# Altium PCB 核心板.PcbDoc
Units mm, origin at the board's own origin, x right, y up, seen from the top; angles counter-clockwise.
Board outline 59.69 x 46.99 mm, 2 copper layers (Top Layer, Bottom Layer); 53 components, 131 nets, 394 pads, 74 vias.
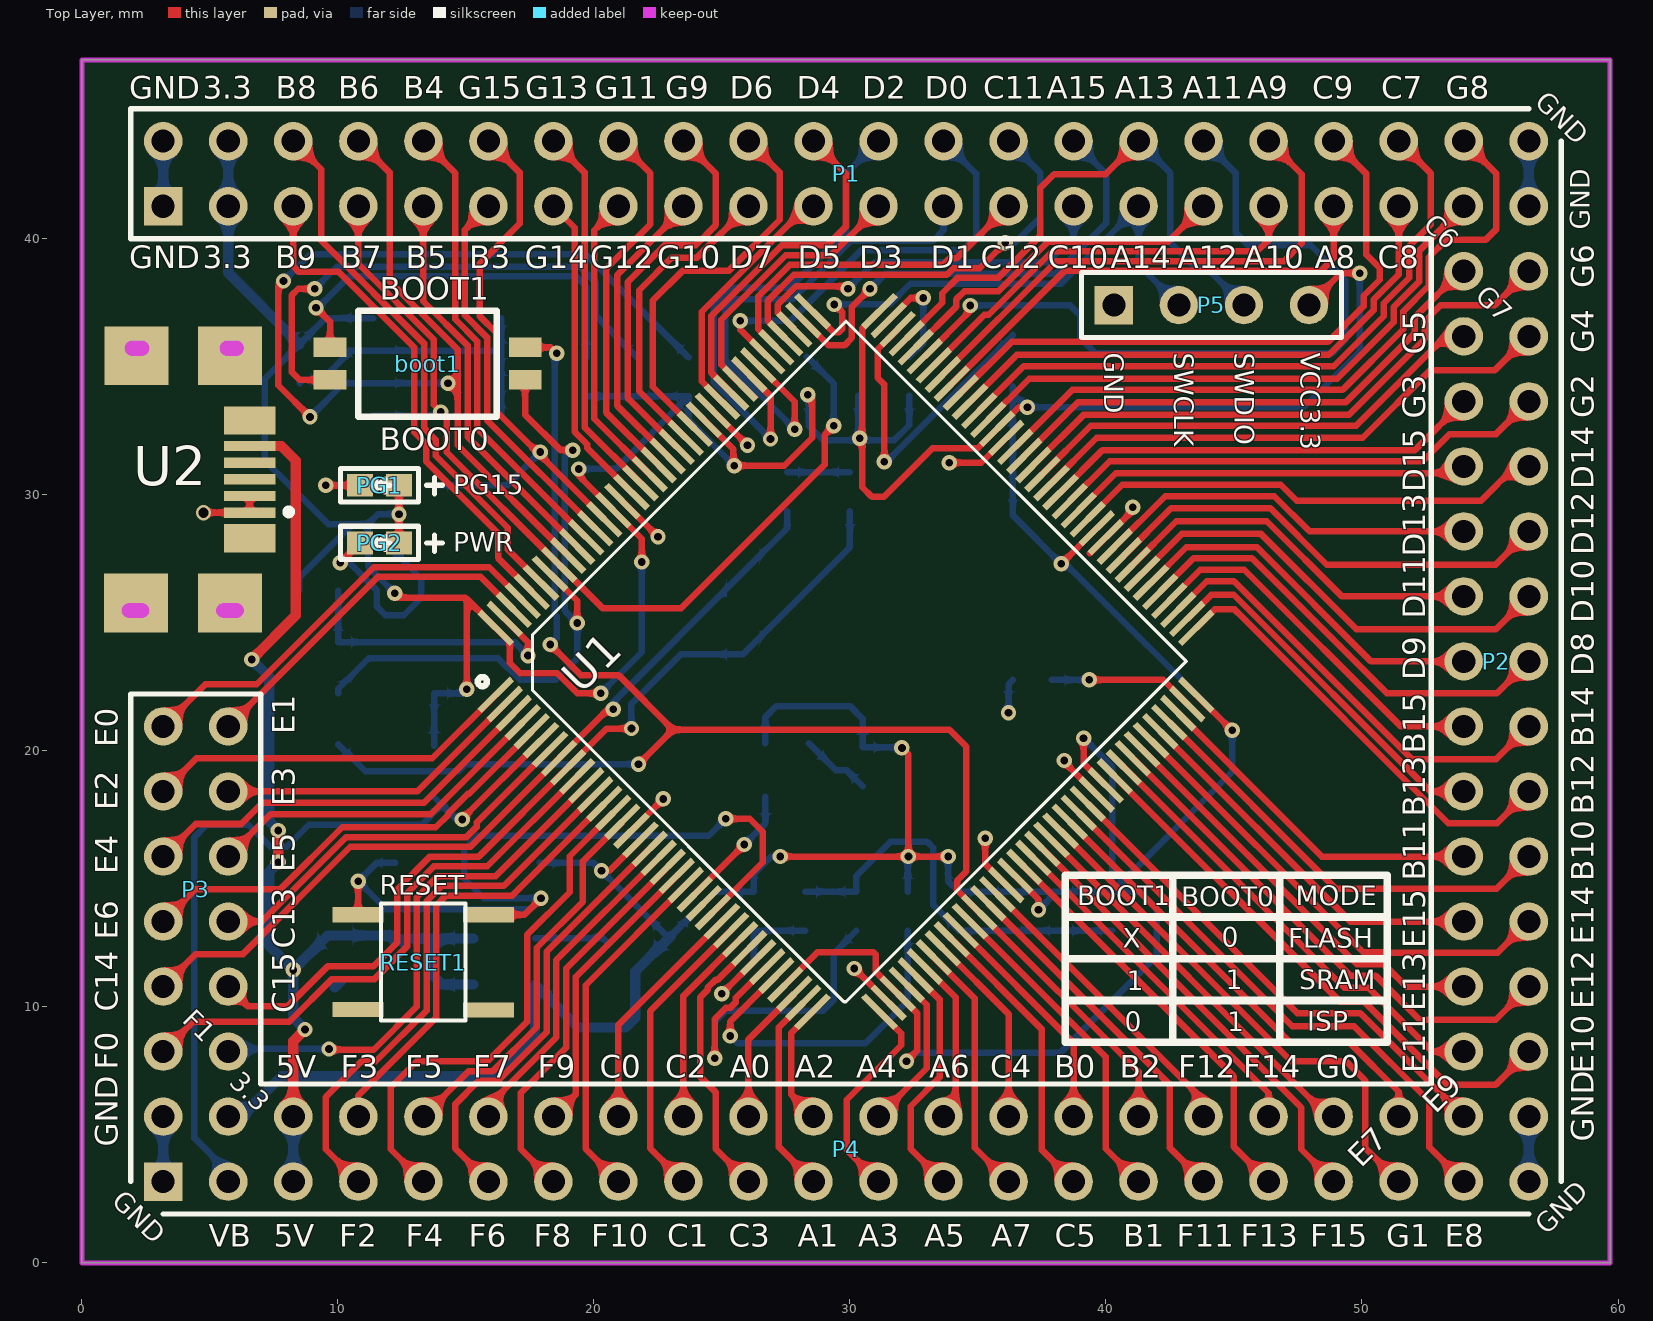
[diagram p0: Top Layer view]
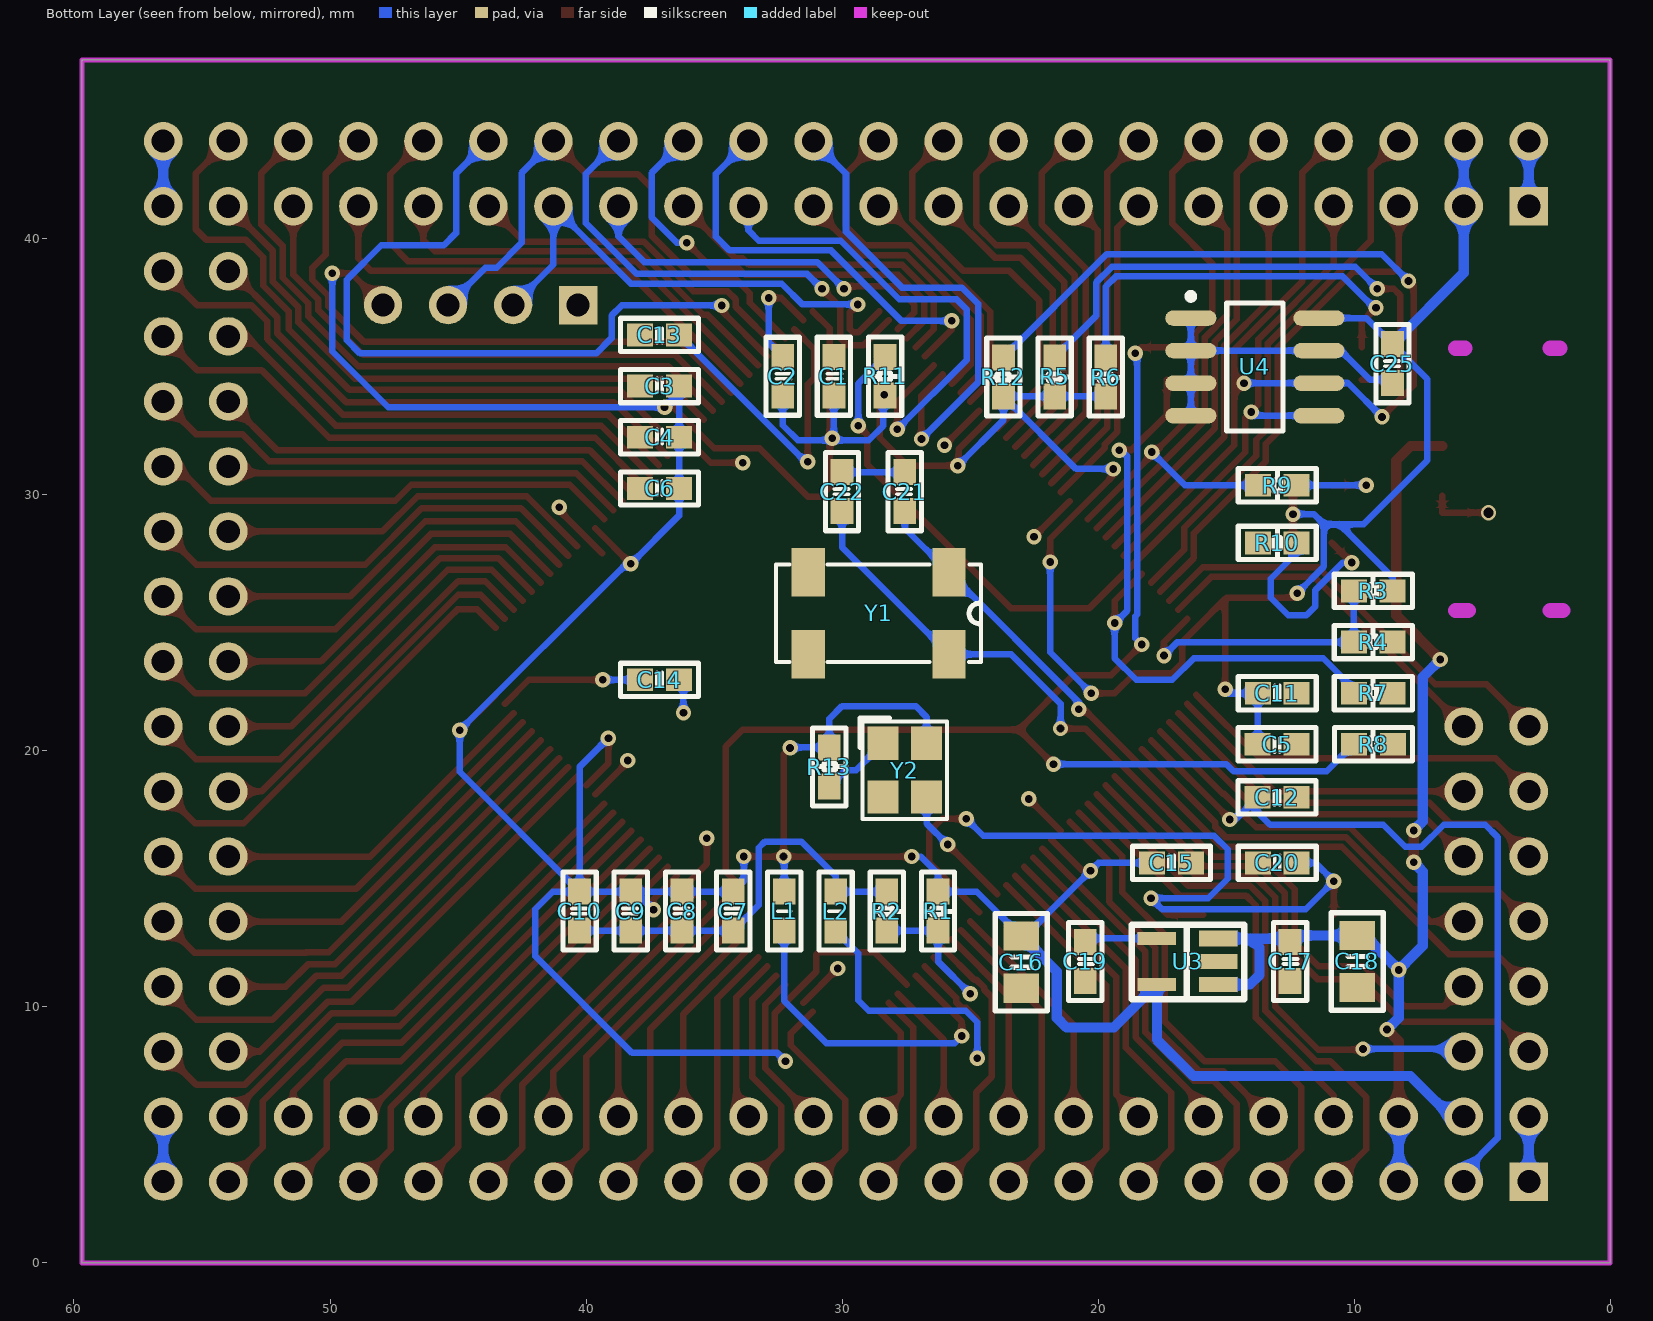
[diagram p1: Bottom Layer view, seen from below]

## Layer stack, top to bottom
Top Solder: solder mask 0.0102, Solder Resist, Dk 3.5
Top Layer: signal copper 0.0356
Dielectric 1: dielectric 0.32, FR-4, Dk 4.8
Bottom Layer: signal copper 0.0356
Bottom Solder: solder mask 0.0102, Solder Resist, Dk 3.5

## Board outline
0,0 0,46.99 59.69,46.99 59.69,0

## Design rules (kind name [scope] priority, off if disabled: settings)
Clearance Clearance_1 [InComponent('U2')] p1: gap=0 ignorepadtopadclearanceinfootprint=FALSE
Clearance [All] p2: gap=0.127 ignorepadtopadclearanceinfootprint=FALSE
ComponentClearance [All] p1: gap=0 collisioncheckmode=3 verticalgap=0 showdistances=FALSE
HoleSize HoleSize_Via [IsVia] p1: absolutevalues=TRUE maxlimit=2.54 minlimit=0.025 maxpercent=80.000 minpercent=20.000
HoleSize HoleSize_Pad [IsPad] p2: absolutevalues=TRUE maxlimit=6.35 minlimit=0.3 maxpercent=80.000 minpercent=20.000
HoleToHoleClearance [All] p1: gap=0.152 allowstackedmicrovias=TRUE
MinimumSolderMaskSliver [All] p1: minsoldermaskwidth=0.001
PolygonConnect [All] p1: connectstyle=Relief reliefconductorwidth=0.254 reliefentries=4 polygonreliefangle="90 Angle" airgapwidth=0.254
RoutingVias [All] p1: holewidth=0.3 width=0.6 viastyle="Through Hole" minholewidth=0.3 minwidth=0.6 maxholewidth=2.54 maxwidth=3
SilkToSilkClearance [All] p1: silktosilkclearance=0
SilkToSolderMaskClearance [IsPad] p1: minsilkscreentomaskgap=0 clearancetoexposedcopper=TRUE
SolderMaskExpansion [All] p1: expansion=0.102
Width [All] p1: maxlimit=3 minlimit=0.15 preferedwidth=0.254
24 further rules are at their usual default settings.

## Components (designator, comment, footprint, x,y, rotation, side; value= is the part's Value field where it differs from the comment)
boot1 "Header 2X2" BOOT 13.5,35.125 r90 top locked
C1 "104,0603" C0603 30.317,34.635 r90 bottom
C2 "104,0603" C0603 32.317,34.635 r90 bottom
C3 "104,0603" C0603 37.125,34.25 r0 bottom
C4 "104,0603" C0603 37.125,32.25 r0 bottom
C5 "104,0603" C0603 13.005,20.26 r180 bottom
C6 "104,0603" C0603 37.125,30.25 r0 bottom
C7 "104,0603" C0603 34.25,13.74 r270 bottom
C8 "104,0603" C0603 36.25,13.74 r270 bottom
C9 "104,0603" C0603 38.25,13.74 r270 bottom
C10 "104,0603" C0603 40.25,13.74 r270 bottom
C11 "104,0603" C0603 13,22.25 r0 bottom
C12 "104,0603" C0603 13.005,18.186 r180 bottom
C13 "104,0603" C0603 37.125,36.25 r180 bottom
C14 "104,0603" C0603 37.125,22.775 r0 bottom
C15 "104,0603" C0603 17.125,15.625 r0 bottom
C16 "105,0805" C0805tan 23,11.75 r90 bottom
C17 "104,0603" C0603 12.5,11.775 r90 bottom
C18 "105,0805" C0805tan 9.875,11.775 r90 bottom
C19 "223,0603" C0603 20.5,11.775 r90 bottom
C20 "104,0603" C0603 13,15.625 r0 bottom
C21 "10p,0603" C0603 27.548,30.125 r270 bottom
C22 "10p,0603" C0603 30,30.125 r270 bottom
C25 "104,0603" C0603 8.5,35.125 r270 bottom
L1 "4.8nH" L0603 32.257,13.74 r270 bottom
L2 "4.8nH" L0603 30.25,13.74 r270 bottom
P1 "Header 22X2" HDR2X22 3.175,41.275 r0 top locked
P2 "Header 13X2" HDR2X13 53.975,38.735 r270 top locked
P3 "Header 6X2" HDR2X6 3.175,20.955 r270 top
P4 "Header 22X2" "HDR2X22 - duplicate" 3.175,3.175 r0 top locked
P5 "4P,SWD" HDR1X4 40.31,37.414 r0 top locked
PG1 "LED,0805" LED0603 11.625,30.375 r0 top
PG2 "LED,0805" LED0603 11.625,28.125 r0 top
R1 "0R,0603" R0603 26.25,13.74 r270 bottom
R2 "0R,0603" R0603 28.25,13.74 r270 bottom
R3 "0R,0603" R0603 9.25,26.25 r0 bottom
R4 "0R,0603" R0603 9.25,24.25 r0 bottom
R5 "4.7K,0603" R0603 21.695,34.61 r270 bottom
R6 "4.7K,0603" R0603 19.695,34.6 r270 bottom
R7 "10K,0603" R0603 9.25,22.25 r0 bottom
R8 "10K,0603" R0603 9.246,20.26 r0 bottom
R9 "680R,0603" R0603 13,30.375 r180 bottom
R10 "680R,0603" R0603 13,28.125 r180 bottom
R11 "4.7K,0603" R0603 28.317,34.635 r270 bottom
R12 "4.7K,0603" R0603 23.695,34.61 r270 bottom
R13 "4.7K,0603" R0603 30.5,19.375 r90 bottom
RESET1 "SW-PB_V" KEY-SMT 13.335,11.75 r0 top locked
U1 "STM32F407ZGT6" TQFP-144 29.845,23.495 r45 top locked
U2 "micro USB" "MICRO_USB_V2 - DUPLICATE" 6.299,30.607 r270 top
U3 "RT9193" SOT-23-5 16.5,11.775 r90 bottom
U4 "AT24C512" SOP8_N 13.875,35 r180 bottom locked
Y1 "32.768K" MC-306 28.575,25.375 r0 bottom
Y2 "有源晶振" "OSC 3225-4P" 27.548,19.25 r270 bottom

## Footprints (in the part's own frame and the unit in brackets; to place one, negate y for a bottom-side part, rotate by r counter-clockwise, add the part's x,y. Pads: shape width x height; smd on the part's side, far side on the other; paste and mask are expansions set on the pad)
BOOT [mm]
  rect 0.76x1.27 smd: 1(-0.635,-3.81) 2(-0.635,3.81) 3(0.635,-3.81) 4(0.635,3.81)
  silkscreen extent -2.07,-2.7 2.07,2.7
C0603 [mil]
  rect 40x35 smd: 1(-29.92,0) 2(29.92,0)
  silkscreen extent -60,-26 60,26
C0805tan [mil]
  rect 45x55 smd: 1(-40,0) 2(40,0)
  silkscreen extent -75,-40 75,40
HDR1X4 [mm]
  rect 1.5x1.5 hole 0.9: 1(0,0)
  round 1.5 hole 0.9: 2(2.54,0) 3(5.08,0) 4(7.62,0)
  silkscreen extent -1.27,-1.27 8.89,1.27
HDR2X6 [mm]
  round 1.5 hole 0.9: 1(0,0) 2(0,2.54) 3(2.54,0) 4(2.54,2.54) 5(5.08,0) 6(5.08,2.54) 7(7.62,0) 8(7.62,2.54) 9(10.16,0) 10(10.16,2.54) 11(12.7,0) 12(12.7,2.54)
  silkscreen extent -1.27,-1.27 13.97,3.81
HDR2X13 [mm]
  round 1.5 hole 0.9: 1(0,0) 2(0,2.54) 3(2.54,0) 4(2.54,2.54) 5(5.08,0) 6(5.08,2.54) 7(7.62,0) 8(7.62,2.54) 9(10.16,0) 10(10.16,2.54) 11(12.7,0) 12(12.7,2.54) 13(15.24,0) 14(15.24,2.54) 15(17.78,0) 16(17.78,2.54) 17(20.32,0) 18(20.32,2.54) 19(22.86,0) 20(22.86,2.54) 21(25.4,0) 22(25.4,2.54) 23(27.94,0) 24(27.94,2.54) 25(30.48,0) 26(30.48,2.54)
  silkscreen extent -1.27,-1.27 31.75,3.81
HDR2X22 [mm]
  rect 1.5x1.5 hole 0.9: 1(0,0)
  round 1.5 hole 0.9: 2(0,2.54) 3(2.54,0) 4(2.54,2.54) 5(5.08,0) 6(5.08,2.54) 7(7.62,0) 8(7.62,2.54) 9(10.16,0) 10(10.16,2.54) 11(12.7,0) 12(12.7,2.54) 13(15.24,0) 14(15.24,2.54) 15(17.78,0) 16(17.78,2.54) 17(20.32,0) 18(20.32,2.54) 19(22.86,0) 20(22.86,2.54) 21(25.4,0) 22(25.4,2.54) 23(27.94,0) 24(27.94,2.54) 25(30.48,0) 26(30.48,2.54) 27(33.02,0) 28(33.02,2.54) 29(35.56,0) 30(35.56,2.54) 31(38.1,0) 32(38.1,2.54) 33(40.64,0) 34(40.64,2.54) 35(43.18,0) 36(43.18,2.54) 37(45.72,0) 38(45.72,2.54) 39(48.26,0) 40(48.26,2.54) 41(50.8,0) 42(50.8,2.54) 43(53.34,0) 44(53.34,2.54)
  silkscreen extent -1.27,-1.27 54.61,3.81
"HDR2X22 - duplicate" [mm]
  rect 1.5x1.5 hole 0.9: 1(0,0)
  round 1.5 hole 0.9: 2(0,2.54) 3(2.54,0) 4(2.54,2.54) 5(5.08,0) 6(5.08,2.54) 7(7.62,0) 8(7.62,2.54) 9(10.16,0) 10(10.16,2.54) 11(12.7,0) 12(12.7,2.54) 13(15.24,0) 14(15.24,2.54) 15(17.78,0) 16(17.78,2.54) 17(20.32,0) 18(20.32,2.54) 19(22.86,0) 20(22.86,2.54) 21(25.4,0) 22(25.4,2.54) 23(27.94,0) 24(27.94,2.54) 25(30.48,0) 26(30.48,2.54) 27(33.02,0) 28(33.02,2.54) 29(35.56,0) 30(35.56,2.54) 31(38.1,0) 32(38.1,2.54) 33(40.64,0) 34(40.64,2.54) 35(43.18,0) 36(43.18,2.54) 37(45.72,0) 38(45.72,2.54) 39(48.26,0) 40(48.26,2.54) 41(50.8,0) 42(50.8,2.54) 43(53.34,0) 44(53.34,2.54)
  silkscreen extent -1.27,-1.27 54.61,3.81
KEY-SMT [mm]
  rect 2x0.6 smd: 1(-2.55,-1.85) 1(2.55,-1.87) 2(-2.55,1.85) 2(2.55,1.85)
  silkscreen extent -1.65,-2.29 1.65,2.29
L0603 [mil]
  rect 40x35 smd: 1(-29.92,0) 2(29.92,0)
  silkscreen extent -60,-26 60,26
LED0603 [mil]
  rect 40x35 smd: 1(29.92,0) 2(-29.92,0)
  silkscreen extent -60,-26 97,26
MC-306 [mm]
  rect 1.3x1.9 smd: 1(-2.75,-1.6) 2(2.75,-1.6) 3(2.75,1.6) 4(-2.75,1.6)
  silkscreen extent -4,-1.9 4,1.9
"MICRO_USB_V2 - DUPLICATE" [mm]
  rect 0.4x2 smd: 1(1.3,0.254) 2(0.65,0.254) 3(0,0.254) 4(-0.65,0.254) 5(-1.3,0.254)
  rect 2.3x2.5 smd: ""(-4.826,-0.508) ""(-4.826,-4.175) ""(4.826,-0.508) ""(4.826,-4.191)
  rect 1.1x2 smd: ""(-2.3,0.254) ""(2.3,0.254)
  Keep-Out Layer lines w0.6: 5.125,-4.445 5.125,-3.962 ; -5.12,-4.335 -5.12,-3.962 ; 5.125,-0.762 5.125,-0.262 ; -5.125,-0.635 -5.125,-0.262
  silkscreen extent 1.15,1.65 1.4,1.9
"OSC 3225-4P" [mm] "3.2*2.5*0.7mm(长宽高)"
  rect 1.3x1.2 smd: 1(-1.05,-0.85) 2(1.05,-0.85) 3(1.05,0.85) 4(-1.05,0.85)
  silkscreen extent -2.03,-1.75 1.91,1.65, body extent -1.6,-1.25 1.6,1.25, height 0.7
R0603 [mil]
  rect 40x35 smd: 1(-29.92,0) 2(29.92,0)
  silkscreen extent -60,-26 60,26
SOP8_N [mm]
  oval 2x0.6 smd: 1(-2.5,1.905) 2(-2.5,0.635) 3(-2.5,-0.635) 4(-2.5,-1.905) 5(2.5,-1.905) 6(2.5,-0.635) 7(2.5,0.635) 8(2.5,1.905)
  silkscreen extent -2.63,-2.5 1.1,2.88, body extent -2,-2.5 2,2.5, height 1.75
SOT-23-5 [mm]
  rect 0.6x1.5 smd: 1(-0.9,-1.2) 2(0,-1.2)
  rect 0.63x1.5 smd: 3(0.9,-1.2)
  rect 0.5x1.5 smd: 4(0.9,1.2) 5(-0.9,1.2)
  silkscreen extent -1.47,-2.21 1.43,2.18
TQFP-144 [mm]
  rect 1.778x0.254 smd: 1(-10.6,8.75) 2(-10.6,8.25) 3(-10.6,7.75) 4(-10.6,7.25) 5(-10.6,6.75) 6(-10.6,6.25) 7(-10.6,5.75) 8(-10.6,5.25) 9(-10.6,4.75) 10(-10.6,4.25) 11(-10.6,3.75) 12(-10.6,3.25) 13(-10.6,2.75) 14(-10.6,2.25) 15(-10.6,1.75) 16(-10.6,1.25) 17(-10.6,0.75) 18(-10.6,0.25) 19(-10.6,-0.25) 20(-10.6,-0.75) 21(-10.6,-1.25) 22(-10.6,-1.75) 23(-10.6,-2.25) 24(-10.6,-2.75) 25(-10.6,-3.25) 26(-10.6,-3.75) 27(-10.6,-4.25) 28(-10.6,-4.75) 29(-10.6,-5.25) 30(-10.6,-5.75) 31(-10.6,-6.25) 32(-10.6,-6.75) 33(-10.6,-7.25) 34(-10.6,-7.75) 35(-10.6,-8.25) 36(-10.6,-8.75) 73(10.6,-8.75) 74(10.6,-8.25) 75(10.6,-7.75) 76(10.6,-7.25) 77(10.6,-6.75) 78(10.6,-6.25) 79(10.6,-5.75) 80(10.6,-5.25) 81(10.6,-4.75) 82(10.6,-4.25) 83(10.6,-3.75) 84(10.6,-3.25) 85(10.6,-2.75) 86(10.6,-2.25) 87(10.6,-1.75) 88(10.6,-1.25) 89(10.6,-0.75) 90(10.6,-0.25) 91(10.6,0.25) 92(10.6,0.75) 93(10.6,1.25) 94(10.6,1.75) 95(10.6,2.25) 96(10.6,2.75) 97(10.6,3.25) 98(10.6,3.75) 99(10.6,4.25) 100(10.6,4.75) 101(10.6,5.25) 102(10.6,5.75) 103(10.6,6.25) 104(10.6,6.75) 105(10.6,7.25) 106(10.6,7.75) 107(10.6,8.25) 108(10.6,8.75)
  rect 0.254x1.778 smd: 37(-8.75,-10.6) 38(-8.25,-10.6) 39(-7.75,-10.6) 40(-7.25,-10.6) 41(-6.75,-10.6) 42(-6.25,-10.6) 43(-5.75,-10.6) 44(-5.25,-10.6) 45(-4.75,-10.6) 46(-4.25,-10.6) 47(-3.75,-10.6) 48(-3.25,-10.6) 49(-2.75,-10.6) 50(-2.25,-10.6) 51(-1.75,-10.6) 52(-1.25,-10.6) 53(-0.75,-10.6) 54(-0.25,-10.6) 55(0.25,-10.6) 56(0.75,-10.6) 57(1.25,-10.6) 58(1.75,-10.6) 59(2.25,-10.6) 60(2.75,-10.6) 61(3.25,-10.6) 62(3.75,-10.6) 63(4.25,-10.6) 64(4.75,-10.6) 65(5.25,-10.6) 66(5.75,-10.6) 67(6.25,-10.6) 68(6.75,-10.6) 69(7.25,-10.6) 70(7.75,-10.6) 71(8.25,-10.6) 72(8.75,-10.6) 109(8.75,10.6) 110(8.25,10.6) 111(7.75,10.6) 112(7.25,10.6) 113(6.75,10.6) 114(6.25,10.6) 115(5.75,10.6) 116(5.25,10.6) 117(4.75,10.6) 118(4.25,10.6) 119(3.75,10.6) 120(3.25,10.6) 121(2.75,10.6) 122(2.25,10.6) 123(1.75,10.6) 124(1.25,10.6) 125(0.75,10.6) 126(0.25,10.6) 127(-0.25,10.6) 128(-0.75,10.6) 129(-1.25,10.6) 130(-1.75,10.6) 131(-2.25,10.6) 132(-2.75,10.6) 133(-3.25,10.6) 134(-3.75,10.6) 135(-4.25,10.6) 136(-4.75,10.6) 137(-5.25,10.6) 138(-5.75,10.6) 139(-6.25,10.6) 140(-6.75,10.6) 141(-7.25,10.6) 142(-7.75,10.6) 143(-8.25,10.6) 144(-8.75,10.6)
  silkscreen extent -10.78,-9.4 9.4,9.66

## Part data
boot1: "Header, 2-Pin, Dual row"
C1 C2 C3 C4 C5 C6 C7 C8 C9 C10 C11 C12 C13 C14 C15 C16 C17 C18 C19 C20 C21 C22 C25: library part CAP, "Capacitor"
L1 L2: library part Inductor, "Inductor"
P1 P4: "Header, 22-Pin, Dual row"
P2: "Header, 13-Pin, Dual row"
P3: "Header, 6-Pin, Dual row"
P5: library part "Header 4", "Header, 4-Pin"
PG1 PG2: library part LED
R1 R2 R3 R4 R5 R6 R7 R8 R9 R10 R11 R12 R13: library part Res2, "Resistor"
RESET1: "SWITCH"
U1: library part STM32F103ZET6, "STM32F103ZE"
U2: library part usb-STM
U3: library part RT9193X_5P
U4: library part ST24C08RB5, "Serial 8K (1K x 8) EEPROM"
Y1: library part XTAL, "Crystal Oscillator"
Y2: library part XTAL_Active

## Via types
v1: diameter 0.6, hole 0.3, Top Layer to Bottom Layer, tented both sides, 73 vias
v2: diameter 0.6, hole 0.4, Top Layer to Bottom Layer, tented both sides, 1 vias

## Nets (pads, with @x,y where several pads share a name; then routed paths per layer and width w, separated by ;. In a path a pad name is that pad's centre, name@x,y a point inside that pad or via, vN(x,y) a via of type N, cw(c..) or ccw(c..) an arc to the next point about the centre after c; other vN are vias at no path point)
+3.3: C1.1 C2.1 C3.1 C4.1 C5.1 C6.1 C7.1 C8.1 C9.1 C10.1 C11.2 C15.2 C16.2 C25.1 L1.1 P1.3 P1.4 P4.4 P5.4 PG1.1 PG2.1 R1.1 R3.1 R5.2 R6.2 R11.2 R12.2 R13.2 U1.17 U1.33 U1.39 U1.52 U1.62 U1.72 U1.84 U1.95 U1.108 U1.121 U1.131 U1.144 U3.5 U4.8 Y2.4 | length 255.6
  Top Layer w0.254: v1(12.217,26.162) 12.395,25.984 14.981,25.984 15.037,25.929 ; PG2.1 v1(12.385,29.25) PG1.1 ; v1(15.037,22.403) 15.037,25.929 ; v1(19.406,31.013) 19.406,30.752 U1.131 21.869,28.289 v1(21.869,27.381) ; v1(20.269,22.25) 19.355,22.25 18.567,23.038 17.12,23.038 16.713,23.444 16.713,24.252 U1.144 15.037,25.929 ; v1(20.295,15.316) 20.606,15.316 U1.17 ; U1.121 25.446,31.783 25.446,31.171 v1(25.476,31.14) 27.432,31.14 28.524,32.233 28.524,33.731 v1(28.346,33.909) ; v1(27.28,15.875) v1(32.283,15.875) ; U1.33 28.744,12.141 30.912,12.141 31.013,12.04 31.013,11.366 U1.39 32.619,9.761 32.619,8.286 v1(32.207,7.874) ; U1.108 30.48,36.504 30.48,30.302 30.861,29.921 31.318,29.921 33.223,31.826 34.994,31.826 U1.95 36.594,33.426 v1(36.932,33.426) ; v1(32.029,20.117) 32.283,19.863 v1(32.283,15.875) ; v1(33.833,15.875) v1(32.283,15.875) ; U1.52 37.363,14.209 v1(37.363,13.792) ; v1(38.251,27.305) U1.84 ; v1@39.125,20.419 39.125,19.518 U1.62 ; U1.72 v1@44.912,20.803 ; P5.4 49.175,38.659 v1(49.911,38.659)
  Bottom Layer w0.254: R3.1 8.49,26.776 10.569,28.854 ; U4.8 9.52,36.905 C25.1 7.137,34.522 7.137,31.344 9.627,28.854 10.569,28.854 ; v1(12.217,26.162) 11.176,27.203 11.176,28.854 ; v1(12.385,29.25) 11.572,29.25 11.176,28.854 ; C5.1@13.765,20.193 13.76,20.198 C11.2 14.884,22.25 v1(15.037,22.403) ; C15.2 19.986,15.625 v1(20.295,15.316) 22.845,12.766 C16.2 24.734,14.5 R1.1 26.25,15.201 26.924,15.875 v1(27.28,15.875) ; v1(19.406,31.013) 20.859,31.013 R12.2 ; R6.2 19.705,33.85 R5.2 R12.2 ; v1(20.269,22.25) 21.869,23.851 v1(21.869,27.381) ; v1(25.476,31.14) 23.695,32.921 R12.2 ; Y2.4 26.698,21.323 27.125,21.75 30,21.75 30.5,21.25 R13.2 v1@32.011,20.135 ; R11.2 28.392,33.8 28.392,32.695 28.956,32.131 v1@30.353,32.131 ; C1.1 30.317,32.167 v1@30.353,32.131 ; v1(32.207,7.874) 32.537,8.204 38.202,8.204 41.986,11.989 41.986,13.818 41.304,14.5 C10.1 ; L1.1 v1@32.257,15.874 ; C2.1 32.317,32.723 31.725,32.131 v1@30.353,32.131 ; v1(33.833,15.875) 33.833,14.917 C7.1 C8.1 C9.1@38.071,14.5 ; C3.1 C3.1@36.365,33.942 ; v1(37.363,13.792) C9.1@38.071,14.5 ; v1(39.125,20.5) 40.25,19.375 C10.1 ; v1(49.911,38.659) 49.911,35.611 47.727,33.426 v1(36.932,33.426) 36.881,33.426 C3.1@36.365,33.942 ; 10.569,28.854 11.176,28.854 ; C3.1@36.365,33.942 C4.1 C6.1 36.365,29.191 v1(38.251,27.305) 38.43,27.305 v1(44.933,20.803) 44.933,19.183 C10.1 ; C9.1@38.071,14.5 C9.1 C10.1
  Bottom Layer w0.4: P4.4 6.215,5.715 7.8,7.3 16.275,7.3 17.7,8.725 U3.5 19.38,9.195 21.234,9.195 21.615,9.576 21.615,11.381 C16.2 ; P1.4 P1.3 5.715,38.67 C25.1
  other v1: 30.378,32.207
+5: C17.2 C18.2 P4.5 P4.6 U2.5 U3.1 U3.3 | length 43.6
  Top Layer w0.4: U2.5 7.793,31.907 8.357,31.344 8.357,25.298 v1(6.629,23.571) ; v1(7.671,15.646) v1(7.671,16.891) ; P4.6 8.255,8.661 v1(8.712,9.119)
  Bottom Layer w0.4: v1(6.629,23.571) 7.315,22.885 7.315,17.247 v1(7.671,16.891) ; v1(7.671,15.646) 7.315,15.291 7.315,12.385 v1(8.255,11.445) ; P4.5 P4.6 ; v1(8.712,9.119) 8.255,9.576 v1(8.255,11.445) ; C17.2@12.25,12.535 C17.2@12.375,12.66 ; C17.2@12.39,12.675 C17.2@12.375,12.66 ; U3.1 14.068,10.875 13.691,11.252 13.691,12.319 14.047,12.675 ; U3.3 14.047,12.675 ; v1(8.255,11.445) 9.601,12.791 C18.2 12.244,12.791 C17.2@12.375,12.66 ; C17.2@12.375,12.66 C17.2 12.64,12.675 14.047,12.675
BOOT0: boot1.1 R7.2 U1.138 | length 25.4
  Top Layer w0.254: boot1.1 17.31,33.134 18.694,31.75 v1(19.177,31.75) ; U1.138 19.344,25.864 v1(19.344,24.994)
  Bottom Layer w0.254: R7.2 10.01,22.431 11.201,23.622 16.256,23.622 17.103,22.775 18.508,22.775 19.355,23.622 19.355,24.983 v1(19.344,24.994) 18.852,25.486 18.852,31.501 19.101,31.75 v1(19.177,31.75)
BOOT1: boot1.3 P4.32 R8.2 U1.48 | length 62.5
  Top Layer w0.254: boot1.3 18.317,35.76 v1(18.542,35.535) ; v1(18.288,24.155) 19.482,22.962 20.955,22.962 23.089,20.828 ; v1(21.742,19.482) 23.089,20.828 ; P4.32 41.275,7.469 U1.48 34.188,14.555 34.188,14.935 34.544,15.291 34.544,20.168 33.884,20.828 23.089,20.828
  Bottom Layer w0.254: R8.2 11.064,19.202 14.707,19.202 14.986,19.482 v1(21.742,19.482) ; v1(18.288,24.155) 18.542,24.409 18.542,25.257 18.471,25.329 18.471,35.463 v1(18.542,35.535)
GND: C1.2 C2.2 C3.2 C4.2 C5.2 C6.2 C7.2 C8.2 C9.2 C10.2 C11.1 C12.2 C13.1 C14.1 C15.1 C16.1 C17.1 C18.1 C19.1 C20.2 C21.1 C22.1 C25.2 L2.1 P1.1 P1.2 P1.43 P1.44 P4.1 P4.2 P4.43 P4.44 P5.1 R2.1 R4.1 R7.1 R8.1 R10.1 RESET1.1 U1.16 U1.38 U1.51 U1.61 U1.83 U1.94 U1.107 U1.120 U1.130 U2.1 U2.2 U3.2 U4.1 U4.2 U4.3 U4.4 U4.7 Y2.2 | length 65.7
  Top Layer w0.254: v2(4.75,29.307) U2.1 U2.2 ; U1.130 v1(22.5,28.365) ; U1.16 v1(22.707,18.125) ; U1.120 v1(26,31.936) ; v1(30.173,11.5) U1.38 ; U1.107 32.376,37.694 v1(32.868,37.694) ; v1(33.875,31.257) 35.132,31.257 U1.94 ; v1(35.281,16.586) 35.281,15.585 U1.51 ; v1@38.375,19.561 U1.61 ; U1.83@39.373,27.72 U1.83 41.046,29.393 v1(41.046,29.515)
  Bottom Layer w0.254: C25.2 8.635,34.5 9.375,34.5 10.51,35.635 U4.7 U4.2 ; U4.4 U4.3 U4.2 ; U4.1 U4.2 ; C21.1 C22.1 ; R2.1 L2.1 30.25,15.112 31.598,16.459 33.005,16.459 33.25,16.215 33.25,13.98 C7.2 C8.2 C9.2 C10.2 ; C2.2 32.868,35.946 v1(32.868,37.694) ; v1(36.195,21.488) 36.195,22.605 C14.1
  Bottom Layer w0.4: P4.1 P4.2 ; P1.1 P1.2 ; C18.1 C18.1@10.131,11.015 ; P4.43 P4.44 ; P1.43 P1.44
  other v1: 38.375,19.625
GNDOrVCAP_1: C14.2 U1.71 | length 5.7
  Top Layer w0.254: v1(39.35,22.775) 42.232,22.775 U1.71
  Bottom Layer w0.254: C14.2 v1(39.35,22.775)
GNDOrVCC2: R1.2 R2.2 U1.30 | length 7
  Top Layer w0.254: v1(24.994,10.516) 26.412,11.934 U1.30
  Bottom Layer w0.254: v1(24.994,10.516) 26.25,11.772 R1.2 R2.2
GNDOrVCC3: R3.2 R4.2 U1.143 | length 11.4
  Top Layer w0.254: U1.143 17.424,24.248 v1(17.424,23.724)
  Bottom Layer w0.254: R3.2 R4.2 16.898,24.25 v1(17.424,23.724)
NC/VCAP_2: C13.2 U1.106 | length 12.7
  Top Layer w0.254: v1(31.344,31.293) 31.344,34.315 31.09,34.569 31.09,35.687 31.86,36.458 U1.106
  Bottom Layer w0.254: v1(31.344,31.293) 31.425,31.293 36.365,36.233 C13.2
Netboot1_2: boot1.2 R5.1 | length 20.8
  Top Layer w0.254: v1(9.093,38.049) 8.447,38.049 8.204,37.806 8.204,34.793 8.507,34.49 boot1.2
  Bottom Layer w0.254: v1(9.093,38.049) 9.957,38.913 19.457,38.913 20.076,38.293 20.076,36.989 R5.1
Netboot1_4: boot1.4 R6.1 | length 15.8
  Top Layer w0.254: v1(9.144,37.313) 9.69,36.767 boot1.4
  Bottom Layer w0.254: v1(9.144,37.313) 9.22,37.313 10.439,38.532 19.299,38.532 19.695,38.136 R6.1
NetC19_2: C19.2 U3.4 | length 2.9
  Bottom Layer w0.254: U3.4 20.36,12.675 C19.2
NetPG1_2: PG1.2 R9.2 | length 4.1
  Top Layer w0.254: v1(9.525,30.378) 9.528,30.375 PG1.2
  Bottom Layer w0.254: v1(9.525,30.378) 12.237,30.378 R9.2
NetPG2_2: PG2.2 R10.2 | length 8.3
  Top Layer w0.254: v1(10.096,27.356) PG2.2
  Bottom Layer w0.254: v1(10.096,27.356) 10.439,27.356 11.51,26.285 11.51,25.65 11.862,25.298 12.573,25.298 13.259,25.984 13.259,26.721 12.24,27.74 R10.2
NetR13_1: R13.1 Y2.1 | length 2.8
  Bottom Layer w0.254: Y2.1 29.448,19.25 29.865,19.25 R13.1
NetU1_23: U1.23 Y2.3 | length 4.9
  Top Layer w0.254: U1.23 v1(25.875,16.343)
  Bottom Layer w0.254: v1(25.875,16.343) 26.698,17.166 Y2.3
NRST: C20.1 RESET1.2 U1.25 | length 33.8
  Top Layer w0.254: RESET1.2@10.785,13.6 v1@10.785,14.783 ; RESET1.2@15.885,13.6 17.283,13.6 v1(17.932,14.249) ; U1.25 26.594,15.648 26.594,16.84 26.086,17.348 v1(25.146,17.348)
  Bottom Layer w0.254: C20.1 11.51,15.625 v1(10.795,14.91) 11.887,13.818 17.501,13.818 v1(17.932,14.249) 15.697,14.249 14.935,15.011 14.935,16.154 15.469,16.688 24.486,16.688 v1(25.146,17.348)
PA0: P4.20 U1.34 | length 5.5
  Top Layer w0.254: P4.20 26.035,8.725 U1.34
PA1: P4.21 U1.35 | length 7.9
  Top Layer w0.254: U1.35 27.225,9.208 27.225,4.525 P4.21
PA2: P4.22 U1.36 | length 4.8
  Top Layer w0.254: U1.36 27.7,8.976 27.7,6.59 P4.22
PA3: P4.23 U1.37 | length 8.4
  Top Layer w0.254: P4.23 29.875,4.415 29.875,6.375 32,8.5 32,8.966 U1.37
PA4: P4.24 U1.40 | length 6.3
  Top Layer w0.254: P4.24 33,7.6 33,10.087 U1.40
PA5: P4.25 U1.41 | length 9.4
  Top Layer w0.254: U1.41 33.5,10.294 33.5,7.25 32.375,6.125 32.375,4.455 P4.25
PA6: P4.26 U1.42 | length 6.6
  Top Layer w0.254: U1.42 34.125,10.376 34.125,6.185 P4.26
PA7: P4.27 U1.43 | length 10
  Top Layer w0.254: U1.43 34.875,10.333 34.875,4.495 P4.27
PA8: P1.37 U1.100 | length 19
  Top Layer w0.254: U1.100 38.382,38.75 48.4,38.75 48.895,39.245 P1.37
PA9: P1.36 U1.101 | length 20.7
  Top Layer w0.254: U1.101 38.056,39.131 46.956,39.131 47.65,39.825 47.65,42.52 P1.36
PA10: P1.35 U1.102 | length 16.4
  Top Layer w0.254: U1.102 35.254,37.036 35.422,37.036 37.899,39.512 45.912,39.512 46.355,39.955 P1.35
PA11: P1.34 U1.103 | length 30.3
  Top Layer w0.254: U1.103 34.7,37.189 v1(34.7,37.4)
  Bottom Layer w0.254: v1(34.7,37.4) 38.605,37.4 39,37.005 39,36.125 39.6,35.525 48.825,35.525 49.35,36.05 49.35,38.4 ; P1.34 45.075,42.555 45.075,40.225 45.55,39.75 48,39.75 49.3,38.45
PA12: P1.33 U1.104 | length 13.7
  Top Layer w0.254: U1.104 34.146,37.342 34.146,37.629 34.471,37.954 35.802,37.954 37.741,39.893 42.433,39.893 P1.33
PA13: P1.32 P5.3 U1.105 | length 21.9
  Top Layer w0.254: U1.105 33.6,37.503 33.6,37.875 34.2,38.475 35.784,38.475 37.44,40.131 37.44,41.994 37.971,42.525 39.985,42.525 P1.32
  Bottom Layer w0.254: P1.32 42.52,42.57 42.52,39.844 43.489,38.875 43.929,38.875 P5.3
PA14: P1.31 P5.2 U1.109 | length 20.6
  Top Layer w0.254: U1.109 29.367,36.347 29.566,36.347 29.693,36.474 29.693,37.135 v1(29.388,37.44)
  Bottom Layer w0.254: v1(29.388,37.44) 31.547,37.44 32.355,38.248 38.248,38.248 P1.31 41.275,38.989 P5.2
PA15: P1.30 U1.110 | length 18.9
  Top Layer w0.254: U1.110 29.168,35.839 29.783,35.839 30.074,36.13 30.074,37.338 v1(30.785,38.049)
  Bottom Layer w0.254: v1(30.785,38.049) 31.364,38.629 38.019,38.629 40.005,40.615 40.005,42.545 P1.30 P1.30@38.96,43.815
PB0: P4.30 U1.46 | length 9.1
  Top Layer w0.254: U1.46 38.735,8.595 P4.30
PB1: P4.31 U1.47 | length 12.9
  Top Layer w0.254: U1.47 39.992,8.045 39.992,4.458 P4.31
PB3: P1.11 U1.133 | length 15.1
  Top Layer w0.254: P1.11 14.961,40.361 14.961,37.015 15.824,36.151 15.824,32.92 U1.133
PB4: P1.10 U1.134 | length 18.1
  Top Layer w0.254: P1.10 14.58,42.57 14.58,36.857 15.443,35.993 15.443,32.593 U1.134
PB5: P1.9 U1.135 | length 15.8
  Top Layer w0.254: P1.9 13.335,37.563 15.062,35.836 15.062,32.267 U1.135
PB6: P1.8 R12.1 U1.136 U4.6 | length 50.3
  Top Layer w0.254: v1(7.874,38.354) 7.671,38.151 7.671,34.285 v1(8.91,33.045) ; P1.8 12.014,42.596 12.014,38.345 14.681,35.678 14.681,34.696 ; v1(14.3,34.365) 14.681,33.985 ; v1@14.35,34.365 14.681,34.696 ; U1.136 14.681,31.941 14.681,33.985 ; 14.681,33.985 14.681,34.696
  Bottom Layer w0.254: v1(7.874,38.354) 8.915,39.395 19.669,39.395 R12.1 ; v1(8.91,33.045) 10.23,34.365 U4.6 v1(14.3,34.365)
PB7: P1.7 R11.1 U1.137 U4.5 | length 38
  Top Layer w0.254: P1.7 10.795,39.025 13.746,36.074 13.746,33.523 14.249,33.02 14.249,31.666 U1.137 20.338,25.578 23.408,25.578 29.007,31.176 29.007,32.339 v1(29.362,32.695)
  Bottom Layer w0.254: U4.5 13.877,33.095 v1(14.021,33.239) ; R11.1 29.362,34.35 v1@29.362,32.791
PB8: P1.6 U1.139 | length 21.3
  Top Layer w0.254: P1.6 9.347,42.723 9.347,39.934 13.365,35.916 13.365,32.609 13.822,32.152 13.822,31.527 16.637,28.712 16.637,27.864 U1.139
PB9: P1.5 U1.140 | length 19.8
  Top Layer w0.254: P1.5 8.255,38.933 8.478,38.71 10.033,38.71 12.984,35.758 12.984,32.451 13.441,31.994 13.441,31.314 16.256,28.499 16.256,27.538 U1.140
PB10: P2.20 U1.69 | length 17.3
  Top Layer w0.254: U1.69 48.968,14.625 55.265,14.625 P2.20
PB11: P2.19 U1.70 | length 13.5
  Top Layer w0.254: U1.70 48.425,15.875 P2.19
PB12: P2.18 U1.73 | length 17.3
  Top Layer w0.254: U1.73 44.251,25.527 45.02,25.527 45.339,25.208 53.372,17.175 55.275,17.175 P2.18
PB13: P2.17 U1.74 | length 14.4
  Top Layer w0.254: U1.74 44.117,26.1 44.986,26.1 52.671,18.415 P2.17
PB14: P2.16 U1.75 | length 17.6
  Top Layer w0.254: U1.75 43.935,26.625 45,26.625 51.95,19.675 55.235,19.675 P2.16
PB15: P2.15 U1.76 | length 14.5
  Top Layer w0.254: U1.76 43.678,27.075 45.4,27.075 51.52,20.955 P2.15
PC0: P4.16 U1.26 | length 9.3
  Top Layer w0.254: P4.16 20.955,9.302 U1.26
PC1: P4.17 U1.27 | length 11.7
  Top Layer w0.254: P4.17 22.2,4.47 22.2,9.84 U1.27
PC2: P4.18 U1.28 | length 7.8
  Top Layer w0.254: P4.18 23.495,10.427 U1.28
PC3: P4.19 U1.29 | length 10.7
  Top Layer w0.254: P4.19 24.75,4.46 24.75,6.675 24.16,7.265 24.16,10.386 24.44,10.665 24.44,10.745 24.764,11.07 24.844,11.07 U1.29
PC4: P4.28 U1.44 | length 7.6
  Top Layer w0.254: U1.44 36.195,9.72 P4.28
PC5: P4.29 U1.45 | length 11.4
  Top Layer w0.254: U1.45 37.5,9.122 37.5,4.41 P4.29
PC6: P1.41 U1.96 | length 23.1
  Top Layer w0.254: U1.96 37,34.539 49.03,34.539 51.231,36.74 51.231,37.325 52.231,38.325 52.231,39.531 P1.41
PC7: P1.40 U1.97 | length 25.4
  Top Layer w0.254: U1.97 36.779,35.025 48.893,35.025 50.85,36.982 50.85,37.483 51.85,38.483 51.85,39.725 52.68,40.555 52.68,42.57 P1.40
PC8: P1.39 U1.98 | length 21.7
  Top Layer w0.254: U1.98 36.522,35.475 48.708,35.475 50.45,37.217 50.45,37.622 51.435,38.607 P1.39
PC9: P1.38 U1.99 | length 24.6
  Top Layer w0.254: U1.99 36.315,35.975 48.67,35.975 50.069,37.374 50.069,37.779 50.694,38.404 50.694,38.863 50.175,39.381 50.175,42.535 P1.38
PC10: P1.29 U1.111 | length 15.2
  Top Layer w0.254: U1.111 27.178,37.122 27.178,37.435 27.893,38.15 29.82,38.15 v1(29.921,38.049)
  Bottom Layer w0.254: v1(29.921,38.049) 30.963,39.091 37.719,39.091 38.735,40.107 P1.29
PC11: P1.28 U1.112 | length 17.2
  Top Layer w0.254: U1.112 26.797,36.796 26.797,37.593 27.807,38.603 33.789,38.603 34.042,38.856 35.071,38.856 v1(36.068,39.853)
  Bottom Layer w0.254: v1(36.068,39.853) 36.449,39.853 37.44,40.843 37.44,42.57 P1.28
PC12: P1.27 U1.113 | length 13.5
  Top Layer w0.254: U1.113 26.416,36.47 26.416,37.751 27.649,38.984 33.632,38.984 33.884,39.237 34.157,39.237 P1.27
PC13: P3.8 U1.7 | length 15.5
  Top Layer w0.254: P3.8 7.024,13.335 10.326,16.637 15.024,16.637 15.413,17.026 15.413,17.195 U1.7
PC14: C21.2 P3.9 U1.8 Y1.1 | length 32.6
  Top Layer w0.254: P3.9 4.445,12.065 6.293,12.065 10.484,16.256 15.181,16.256 U1.8 20.55,21.625 v1(20.759,21.625)
  Bottom Layer w0.254: v1(20.759,21.625) 20.759,21.841 20.725,21.875 Y1.1 27.548,28.698 C21.2
PC15: C22.2 P3.10 U1.9 Y1.4 | length 35.2
  Top Layer w0.254: P3.10 6.477,10.033 8.045,10.033 9.592,11.58 11.381,11.58 12.319,12.518 12.319,14.601 13.593,15.875 15.507,15.875 U1.9 18.991,19.366 20.5,20.875 v1(21.466,20.875)
  Bottom Layer w0.254: v1(21.466,20.875) 21.466,21.841 23.4,23.775 Y1.4 30,27.95 C22.2
PD0: P1.26 U1.114 | length 16.7
  Top Layer w0.254: v1(25.708,36.796) 25.708,36.47 U1.114
  Bottom Layer w0.254: v1(25.708,36.796) 27.677,36.796 30.429,39.548 34.392,39.548 34.925,40.081 34.925,42.545 P1.26
PD1: P1.25 U1.115 | length 19.6
  Top Layer w0.254: U1.115 27.838,33.633 v1(27.838,32.563)
  Bottom Layer w0.254: v1(27.838,32.563) 25.121,35.281 25.121,37.236 25.527,37.643 27.762,37.643 30.048,39.929 33.249,39.929 33.655,40.335 P1.25
PD2: P1.24 U1.116 | length 19.4
  Top Layer w0.254: U1.116 26.899,33.866 v1(26.899,32.182)
  Bottom Layer w0.254: v1(26.899,32.182) 24.689,34.392 24.689,37.465 25.324,38.1 27.661,38.1 29.845,40.284 29.845,42.545 P1.24
PD3: P1.23 U1.117 | length 10.8
  Top Layer w0.254: U1.117 24.968,35.089 24.968,36.842 27.492,39.365 29.261,39.365 31.115,41.219 P1.23
PD4: P1.22 U1.118 | length 13.9
  Top Layer w0.254: U1.118 24.587,34.763 24.587,37 27.334,39.746 29.104,39.746 29.845,40.488 29.845,42.545 P1.22
PD5: P1.21 U1.119 | length 9.9
  Top Layer w0.254: U1.119 24.206,34.437 24.206,37.157 28.324,41.275 P1.21
PD6: P1.20 U1.122 | length 17.2
  Top Layer w0.254: U1.122 22.301,34.221 22.301,37.592 ; P1.20 27.254,42.596 27.254,40.744 25.26,38.75 23.459,38.75 ; 22.301,37.592 23.459,38.75 ; 22.301,37.592 23.459,38.75
PD7: P1.19 U1.123 | length 12.1
  Top Layer w0.254: U1.123 21.768,34.047 21.768,37.998 23.038,39.268 24.028,39.268 P1.19
PD8: P2.14 U1.77 | length 17.6
  Top Layer w0.254: U1.77 43.421,27.525 45.7,27.525 50.975,22.25 55.27,22.25 P2.14
PD9: P2.13 U1.78 | length 14.6
  Top Layer w0.254: U1.78 43.139,27.95 45.9,27.95 50.355,23.495 P2.13
PD10: P2.12 U1.79 | length 17.8
  Top Layer w0.254: U1.79 42.957,28.475 46.058,28.475 49.783,24.75 55.23,24.75 P2.12
PD11: P2.11 U1.80 | length 14.8
  Top Layer w0.254: U1.80 42.75,28.975 46.275,28.975 49.215,26.035 P2.11
PD12: P2.10 U1.81 | length 18
  Top Layer w0.254: U1.81 42.543,29.475 46.425,29.475 48.625,27.275 55.215,27.275 P2.10
PD13: P2.9 U1.82 | length 15
  Top Layer w0.254: U1.82 42.31,29.95 46.575,29.95 47.95,28.575 P2.9
PD14: P2.8 U1.85 | length 18.6
  Top Layer w0.254: U1.85 40.639,30.4 46.825,30.4 47.45,29.775 54.65,29.775 55.99,31.115 P2.8
PD15: P2.7 U1.86 | length 15.8
  Top Layer w0.254: U1.86 40.382,30.85 53.76,30.85 53.975,31.065 P2.7
PE0: P3.1 U1.141 | length 17.2
  Top Layer w0.254: P3.1 4.826,22.606 6.827,22.606 11.399,27.178 15.909,27.178 U1.141
PE1: P3.2 U1.142 | length 14.1
  Top Layer w0.254: P3.2 11.557,26.797 15.583,26.797 U1.142
PE2: P3.3 U1.1 | length 14.5
  Top Layer w0.254: P3.3 4.472,19.712 13.688,19.712 U1.1
PE3: P3.4 U1.2 | length 12.2
  Top Layer w0.254: P3.4 13.098,18.415 U1.2
PE4: P3.5 U1.3 | length 16
  Top Layer w0.254: P3.5 4.445,17.145 6.223,17.145 7.045,17.967 13.357,17.967 U1.3
PE5: P3.6 U1.4 | length 13.7
  Top Layer w0.254: P3.6 7.366,17.526 13.623,17.526 U1.4
PE6: P3.7 U1.5 | length 17.5
  Top Layer w0.254: P3.7 4.445,14.605 7.755,14.605 10.168,17.018 13.822,17.018 14.305,17.501 14.305,17.552 15.077,18.324 15.128,18.324 U1.5
PE7: P4.40 U1.58 | length 18.2
  Top Layer w0.254: U1.58 47.22,8.595 49.53,8.595 51.435,6.69 P4.40
PE8: P4.41 U1.59 | length 22.1
  Top Layer w0.254: U1.59 47.272,9.25 49.688,9.25 52.625,6.313 52.625,4.525 P4.41
PE9: P4.42 U1.60 | length 19.8
  Top Layer w0.254: U1.60 47.479,9.75 49.94,9.75 P4.42
PE10: P2.26 U1.63 | length 21.7
  Top Layer w0.254: U1.63 49.157,10.193 50.095,10.193 53.338,6.951 55.211,6.951 P2.26
PE11: P2.25 U1.64 | length 17.9
  Top Layer w0.254: U1.64 49.308,10.75 50.25,10.75 52.745,8.255 P2.25
PE12: P2.24 U1.65 | length 20.2
  Top Layer w0.254: U1.65 49.538,11.227 50.523,11.227 52.25,9.5 55.22,9.5 P2.24
PE13: P2.23 U1.66 | length 16.4
  Top Layer w0.254: U1.66 49.797,11.675 50.845,11.675 51.725,10.795 P2.23
PE14: P2.22 U1.67 | length 18.7
  Top Layer w0.254: U1.67 50.048,12.131 50.927,12.131 50.933,12.125 55.305,12.125 P2.22
PE15: P2.21 U1.68 | length 14.9
  Top Layer w0.254: U1.68 49.551,13.335 P2.21
PF0: P3.11 U1.10 | length 21.8
  Top Layer w0.254: P3.11 4.343,9.423 8.099,9.423 9.766,11.09 11.43,11.09 12.7,12.36 12.7,14.443 13.751,15.494 15.834,15.494 U1.10
PF1: P3.12 U1.11 | length 20.7
  Top Layer w0.254: v1@9.754,8.331 11.4,8.331 13.081,10.012 13.081,14.286 13.908,15.113 16.16,15.113 U1.11
  Bottom Layer w0.254: P3.12 5.817,8.357 v1(9.652,8.357)
PF2: P4.7 U1.12 | length 21.8
  Top Layer w0.254: P4.7 9.525,4.445 9.525,6.477 10.922,7.874 11.481,7.874 13.462,9.855 13.462,14.128 14.066,14.732 16.486,14.732 U1.12
PF3: P4.8 U1.13 | length 17.7
  Top Layer w0.254: P4.8 10.795,6.538 13.843,9.586 13.843,13.97 14.224,14.351 16.812,14.351 U1.13
PF4: P4.9 U1.14 | length 20.2
  Top Layer w0.254: P4.9 12.065,4.445 12.065,6.858 13.081,7.874 15.84,7.874 17.389,9.423 17.389,12.817 19.05,14.478 19.05,15.882 U1.14
PF5: P4.10 U1.15 | length 15.3
  Top Layer w0.254: P4.10@13.379,5.715 P4.10 15.113,7.493 16.055,7.493 17.77,9.208 17.77,12.312 19.558,14.1 19.558,15.683 U1.15
PF6: P4.11 U1.18 | length 17.1
  Top Layer w0.254: P4.11 14.575,4.475 14.575,6.193 15.494,7.112 16.256,7.112 18.151,9.007 18.151,12.155 U1.18
PF7: P4.12 U1.19 | length 12.9
  Top Layer w0.254: P4.12 15.875,6.15 18.532,8.807 18.532,11.828 U1.19
PF8: P4.13 U1.20 | length 15.2
  Top Layer w0.254: P4.13 17.139,4.451 17.139,6.639 18.913,8.413 18.913,11.502 U1.20
PF9: P4.14 U1.21 | length 11.4
  Top Layer w0.254: P4.14 19.294,6.594 19.294,11.176 U1.21
PF10: P4.15 U1.22 | length 13.7
  Top Layer w0.254: P4.15 19.675,4.455 19.675,10.85 U1.22
PF11: P4.33 U1.49 | length 14.4
  Top Layer w0.254: U1.49 42.5,6.951 42.5,4.49 P4.33
PF12: P4.34 U1.50 | length 12
  Top Layer w0.254: U1.50 43.815,6.343 P4.34
PF13: P4.35 U1.53 | length 16.2
  Top Layer w0.254: U1.53 45,7.279 45,4.53 P4.35
PF14: P4.36 U1.54 | length 13.9
  Top Layer w0.254: U1.54 46.355,6.631 P4.36
PF15: P4.37 U1.55 | length 17.7
  Top Layer w0.254: U1.55 47.625,6.069 47.625,4.445 P4.37
PG0: P4.38 U1.56 | length 15.5
  Top Layer w0.254: U1.56 48.686,5.715 P4.38
PG1: P4.39 U1.57 | length 20.4
  Top Layer w0.254: U1.57 47.233,7.875 49.375,7.875 50.125,7.125 50.125,4.485 P4.39
PG2: P2.6 U1.87 | length 19.6
  Top Layer w0.254: U1.87 40.143,31.318 52.368,31.318 53.425,32.375 55.235,32.375 P2.6
PG3: P2.5 U1.88 | length 17.2
  Top Layer w0.254: U1.88 39.868,31.75 52.07,31.75 P2.5
PG4: P2.4 U1.89 | length 21
  Top Layer w0.254: U1.89 39.638,32.228 50.033,32.228 52.68,34.875 55.195,34.875 P2.4
PG5: P2.3 U1.90 | length 18.5
  Top Layer w0.254: U1.90 39.404,32.7 49.769,32.7 53.264,36.195 P2.3@53.806,36.195
PG6: P2.2 U1.91 | length 22.9
  Top Layer w0.254: U1.91 39.121,33.125 49.483,33.125 52.451,36.093 52.451,36.787 53.078,37.414 55.194,37.414 P2.2
PG7: P2.1 U1.92 | length 20.5
  Top Layer w0.254: U1.92 38.914,33.625 49.373,33.625 52.07,36.322 52.07,36.945 53.86,38.735 P2.1
PG8: P1.42 U1.93 | length 27.3
  Top Layer w0.254: U1.93 38.682,34.1 49.238,34.1 51.612,36.474 51.612,37.167 52.612,38.167 52.612,39.287 53.3,39.975 54.84,39.975 55.25,40.385 55.25,42.54 P1.42
PG9: P1.18 U1.124 | length 15.4
  Top Layer w0.254: U1.124 21.311,33.797 21.311,38.309 22.753,39.751 23.972,39.751 24.765,40.544 24.765,42.545 P1.18
PG10: P1.17 U1.125 | length 11.6
  Top Layer w0.254: U1.125 20.904,33.496 20.904,38.583 23.495,41.173 P1.17
PG11: P1.16 U1.126 | length 14.7
  Top Layer w0.254: P1.16 22.2,42.57 22.2,40.564 20.472,38.837 20.472,33.221 U1.126
PG12: P1.15 U1.127 | length 11.7
  Top Layer w0.254: P1.15 20.015,40.335 20.015,32.971 U1.127
PG13: P1.14 U1.128 | length 14.8
  Top Layer w0.254: P1.14 19.634,42.596 19.634,32.645 U1.128
PG14: P1.13 U1.129 | length 12.4
  Top Layer w0.254: P1.13 19.253,40.437 19.253,32.457 19.731,31.979 19.731,31.841 U1.129
PG15: P1.12 R9.1 U1.132 | length 22.6
  Top Layer w0.254: P1.12 17.094,42.596 17.094,40.589 15.545,39.04 15.545,36.97 16.205,36.309 16.205,33.246 U1.132
  Bottom Layer w0.254: R9.1 16.608,30.375 v1(17.907,31.674)
VBAT: C12.1 P4.3 U1.6 | length 30.7
  Top Layer w0.254: v1(14.859,17.323) 14.859,17.348 U1.6
  Bottom Layer w0.254: P4.3 5.715,3.556 4.394,4.877 4.394,16.637 4.877,17.12 6.498,17.12 7.361,16.256 8.001,16.256 8.865,17.12 13.282,17.12 C12.1@14.057,17.894 ; C12.1 C12.1@14.057,17.894 ; v1(14.859,17.323) 14.628,17.323 C12.1@14.057,17.894
VREF+: L1.2 U1.32 | length 13.6
  Top Layer w0.254: v1(25.324,8.865) 25.324,9.428 U1.32
  Bottom Layer w0.254: v1(25.324,8.865) 25.603,8.585 30.607,8.585 32.257,10.235 L1.2
VREF-: L2.2 U1.31 | length 14
  Top Layer w0.254: v1(24.714,8.001) 24.714,9.525 25.15,9.962 25.319,9.962 25.548,10.19 25.548,10.359 U1.31
  Bottom Layer w0.254: v1(24.714,8.001) 24.714,9.398 25.171,9.855 28.956,9.855 29.362,10.262 29.362,12.092 L2.2
pads on no net: U1.24 U2. U2.3 U2.4 Y1.2 Y1.3

## Polygon pours and split planes (outlines as drawn)
GND on Bottom Layer "NONET_L02_P004" (solid, shelved, pour order 4): 0,0 0,46.99 59.69,46.99 59.69,0
GND on Top Layer "NONET_L01_P003" (solid, shelved, pour order 3): 0,0 0,46.99 59.69,46.99 59.69,0

## Keep-outs
Keep-Out Layer:
  the board outline again, w0.203

## Other copper
Top Layer:
  pour cut-out: 0.546,37.084 7.429,37.084 7.429,33.858 0.546,33.858
  pour cut-out: 0.508,27.356 7.391,27.356 7.391,24.13 0.508,24.13
  pour cut-out: 5.255,33.869 7.646,33.869 7.871,33.645 7.871,27.264 5.255,27.264 5.204,27.315 5.204,33.854
Bottom Layer:
  pour cut-out: 0.635,36.881
  pour cut-out: 0.546,37.084 7.429,37.084 7.429,33.858 0.546,33.858
  pour cut-out: 0.508,27.356 7.391,27.356 7.391,24.13 0.508,24.13

## Silkscreen, mask and mechanical layers (free items; w line width, h text height)
Top Overlay:
  lines w0.3: 38.411,10.25 50.984,10.25 ; 38.411,11.882 50.984,11.882 ; 38.411,13.514 50.984,13.514 ; 42.602,8.618 42.602,15.146 ; 46.793,8.618 46.793,15.146 ; 38.411,8.618 38.411,15.146 50.984,15.146 50.984,8.618 38.411,8.618
  text "GND" at 1.854,45.466 h0.89
  text "3.3" at 4.724,45.466 h0.89
  text "B8" at 7.569,45.466 h0.89
  text "B6" at 10.008,45.466 h0.89
  text "B4" at 12.548,45.466 h0.89
  text "G15" at 14.707,45.466 h0.89
  text "G13" at 17.323,45.466 h0.89
  text "G11" at 20.041,45.466 h0.89
  text "G9" at 22.784,45.466 h0.89
  text "D6" at 25.298,45.466 h0.89
  text "D4" at 27.915,45.466 h0.89
  text "D2" at 30.48,45.466 h0.89
  text "D0" at 32.918,45.466 h0.89
  text "C11" at 35.204,45.466 h0.89
  text "A15" at 37.694,45.466 h0.89
  text "A13" at 40.335,45.466 h0.89
  text "A11" at 43.002,45.466 h0.89
  text "A9" at 45.517,45.466 h0.89
  text "C9" at 48.057,45.466 h0.89
  text "C7" at 50.749,45.466 h0.89
  text "G8" at 53.264,45.466 h0.89
  text "GND" at 56.718,45.288 h0.76 r315
  text "C6" at 52.349,40.513 h0.76 r315
  text "GND" at 58.903,40.361 h0.76 r90
  text "GND" at 1.854,38.862 h0.89
  text "3.3" at 4.724,38.862 h0.89
  text "B9" at 7.544,38.862 h0.89
  text "B7" at 10.109,38.862 h0.89
  text "B5" at 12.649,38.862 h0.89
  text "B3" at 15.138,38.862 h0.89
  text "G14" at 17.297,38.862 h0.89
  text "G12" at 19.863,38.862 h0.89
  text "G10" at 22.479,38.862 h0.89
  text "D7" at 25.298,38.862 h0.89
  text "D5" at 27.965,38.862 h0.89
  text "D3" at 30.353,38.862 h0.89
  text "D1" at 33.147,38.862 h0.89
  text "C12" at 35.103,38.862 h0.89
  text "C10" at 37.719,38.862 h0.89
  text "A14" at 40.183,38.862 h0.89
  text "A12" at 42.799,38.862 h0.89
  text "A10" at 45.39,38.862 h0.89
  text "A8" at 48.158,38.862 h0.89
  text "C8" at 50.622,38.862 h0.89
  text "G6" at 59.055,38.075 h0.89 r90
  text "G7" at 54.381,37.719 h0.76 r315
  text "BOOT1" at 11.625,37.625 h0.89
  text "GND" at 39.929,35.56 h0.76 r270
  text "SWCLK" at 42.672,35.56 h0.76 r270
  text "SWDIO" at 45.034,35.56 h0.76 r270
  text "VCC3.3" at 47.6,35.56 h0.76 r270
  text "G4" at 59.055,35.535 h0.89 r90
  text "G5" at 52.476,35.484 h0.89 r90
  text "G2" at 59.055,32.995 h0.89 r90
  text "G3" at 52.476,32.969 h0.89 r90
  text "BOOT0" at 11.625,31.75 h0.89
  text "D14" at 59.055,30.226 h0.89 r90
  text "D15" at 52.476,30.099 h0.89 r90
  text "PG15" at 14.5,30.034 h0.76
  text "PWR" at 14.5,27.784 h0.76
  text "D12" at 59.055,27.635 h0.89 r90
  text "D13" at 52.476,27.584 h0.89 r90
  text "D11" at 52.476,25.171 h0.89 r90
  text "D10" at 59.055,24.994 h0.89 r90
  text "D8" at 59.055,22.911 h0.89 r90
  text "D9" at 52.476,22.758 h0.89 r90
  text "E1" at 8.306,20.65 h0.89 r90
  text "E0" at 1.397,20.142 h0.89 r90
  text "B14" at 59.055,20.142 h0.89 r90
  text "B15" at 52.476,19.888 h0.89 r90
  text "E3" at 8.306,17.831 h0.89 r90
  text "E2" at 1.397,17.678 h0.89 r90
  text "B12" at 59.055,17.501 h0.89 r90
  text "B13" at 52.476,17.424 h0.89 r90
  text "E5" at 8.306,15.265 h0.89 r90
  text "E4" at 1.397,15.189 h0.89 r90
  text "B11" at 52.476,14.935 h0.89 r90
  text "B10" at 59.055,14.91 h0.89 r90
  text "RESET" at 11.625,14.375 h0.76
  text "BOOT1" at 38.868,13.965 h0.76
  text "MODE" at 47.403,13.965 h0.76
  text "BOOT0" at 42.932,13.94 h0.76
  text "E6" at 1.397,12.624 h0.89 r90
  text "E14" at 59.055,12.421 h0.89 r90
  text "0" at 44.516,12.345 h0.76
  text "X" at 40.655,12.32 h0.76
  text "FLASH" at 47.123,12.314 h0.76
  text "E15" at 52.476,12.294 h0.89 r90
  text "C13" at 8.306,12.268 h0.89 r90
  text "1" at 44.669,10.694 h0.76
  text "SRAM" at 47.555,10.689 h0.76
  text "1" at 40.808,10.643 h0.76
  text "E12" at 59.055,9.906 h0.89 r90
  text "E13" at 52.476,9.83 h0.89 r90
  text "C14" at 1.397,9.804 h0.89 r90
  text "C15" at 8.306,9.754 h0.89 r90
  text "F1" at 3.886,9.449 h0.76 r315
  text "ISP" at 47.86,9.063 h0.76
  text "0" at 40.732,9.043 h0.76
  text "1" at 44.745,9.043 h0.76
  text "F0" at 1.397,7.544 h0.89 r90
  text "E11" at 52.476,7.417 h0.89 r90
  text "E10" at 59.055,7.391 h0.89 r90
  text "5V" at 7.569,7.239 h0.89
  text "F3" at 10.109,7.239 h0.89
  text "F5" at 12.624,7.239 h0.89
  text "F7" at 15.291,7.239 h0.89
  text "F9" at 17.805,7.239 h0.89
  text "C0" at 20.218,7.239 h0.89
  text "C2" at 22.784,7.239 h0.89
  text "A0" at 25.298,7.239 h0.89
  text "A2" at 27.838,7.239 h0.89
  text "A4" at 30.251,7.239 h0.89
  text "A6" at 33.096,7.239 h0.89
  text "C4" at 35.484,7.239 h0.89
  text "B0" at 37.973,7.239 h0.89
  text "B2" at 40.538,7.239 h0.89
  text "F12" at 42.824,7.239 h0.89
  text "F14" at 45.364,7.239 h0.89
  text "G0" at 48.209,7.239 h0.89
  text "3.3" at 5.715,7.01 h0.76 r315
  text "E9" at 52.883,5.791 h0.89 r45
  text "GND" at 59.055,4.724 h0.89 r90
  text "GND" at 1.397,4.547 h0.89 r90
  text "E7" at 49.962,3.683 h0.89 r45
  text "GND" at 1.118,2.362 h0.76 r315
  text "GND" at 57.226,1.067 h0.76 r45
  text "VB" at 4.953,0.635 h0.89
  text "5V" at 7.493,0.635 h0.89
  text "F2" at 10.058,0.635 h0.89
  text "F4" at 12.649,0.635 h0.89
  text "F6" at 15.113,0.635 h0.89
  text "F8" at 17.653,0.635 h0.89
  text "F10" at 19.888,0.635 h0.89
  text "C1" at 22.86,0.635 h0.89
  text "C3" at 25.273,0.635 h0.89
  text "A1" at 27.965,0.635 h0.89
  text "A3" at 30.328,0.635 h0.89
  text "A5" at 32.893,0.635 h0.89
  text "A7" at 35.509,0.635 h0.89
  text "C5" at 37.998,0.635 h0.89
  text "B1" at 40.665,0.635 h0.89
  text "F11" at 42.774,0.635 h0.89
  text "F13" at 45.263,0.635 h0.89
  text "F15" at 47.981,0.635 h0.89
  text "G1" at 50.952,0.635 h0.89
  text "E8" at 53.238,0.635 h0.89